# EAGLE board SOIC-24-panel-4x1x2 (EAGLE 5.00)
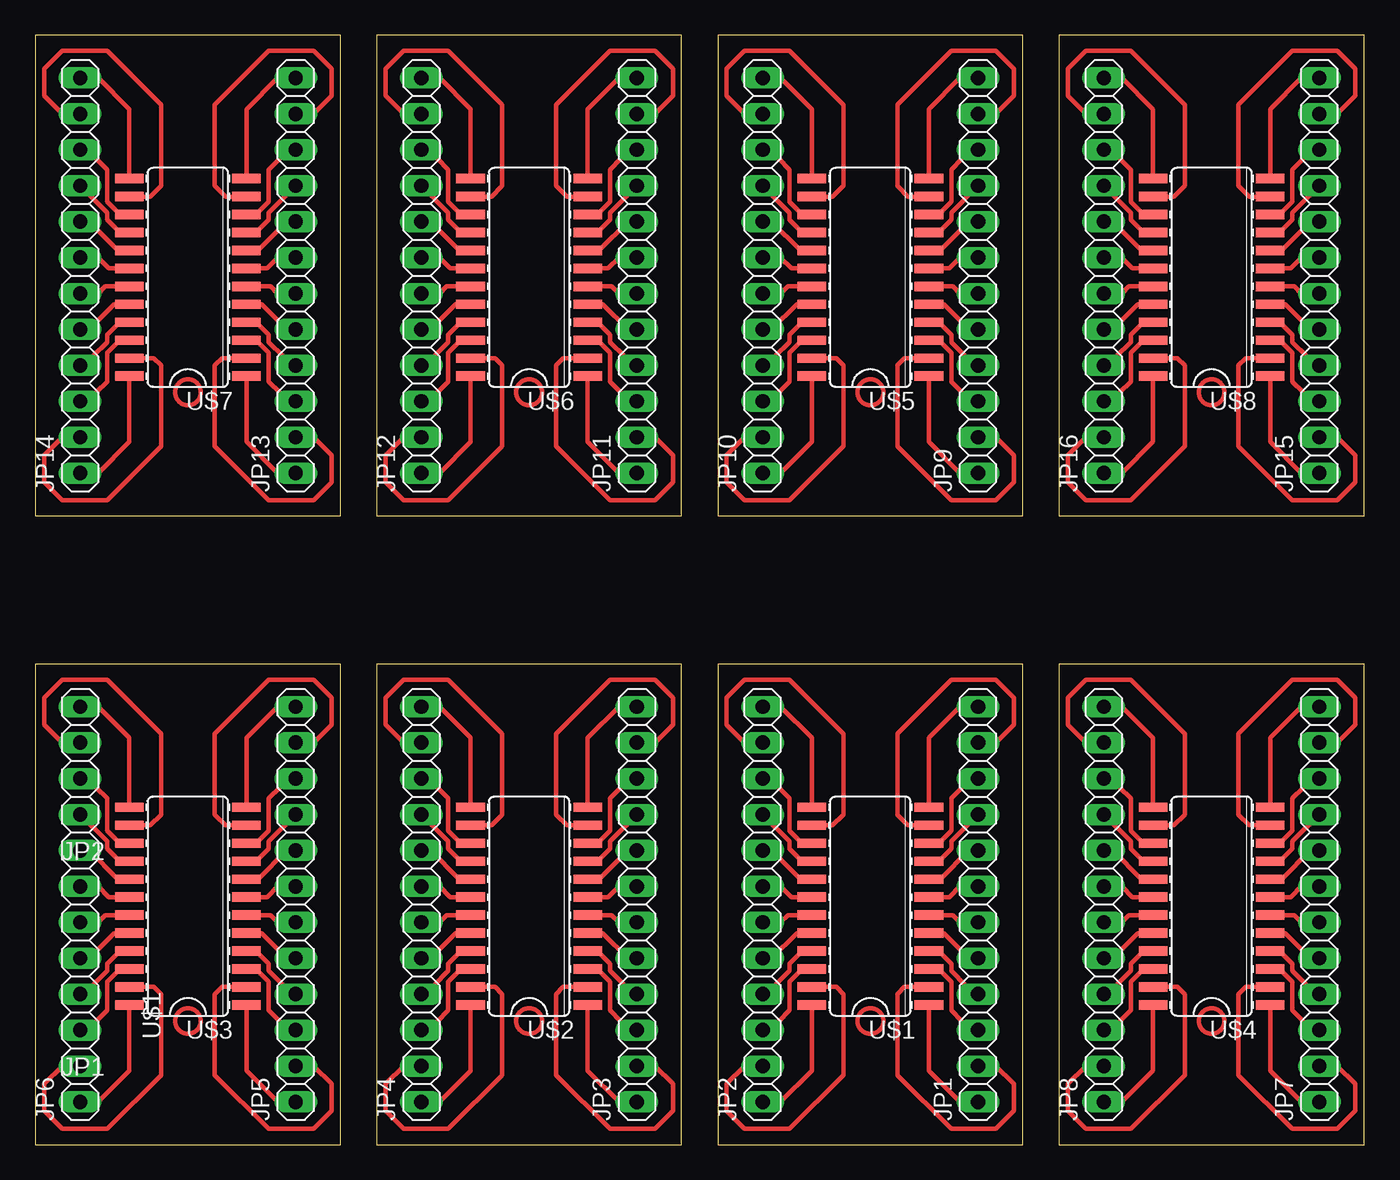
[diagram p0: board, top side]

Size 93.97 x 78.41 mm. Coordinates in mm from the lower left corner, seen from the top.
Outline: 69.84,0 69.84,33.96 48.26,33.96 48.26,0 69.84,0
Outline: 45.71,0 45.71,33.96 24.13,33.96 24.13,0 45.71,0
Outline: 21.58,0 21.58,33.96 0,33.96 0,0 21.58,0
Outline: 93.97,0 93.97,33.96 72.39,33.96 72.39,0 93.97,0
Outline: 69.84,44.45 69.84,78.41 48.26,78.41 48.26,44.45 69.84,44.45
Outline: 45.71,44.45 45.71,78.41 24.13,78.41 24.13,44.45 45.71,44.45
Outline: 21.58,44.45 21.58,78.41 0,78.41 0,44.45 21.58,44.45
Outline: 93.97,44.45 93.97,78.41 72.39,78.41 72.39,44.45 93.97,44.45
Copper layers (1*16): Top 0.035mm / dielectric 1.5mm / Bottom 0.035mm
Design rules "default": minimum track width 10mil, minimum drill 24mil, track to track 8mil, track to pad 8mil, pad to pad 8mil, via to via 8mil, smd to smd 8mil, copper to edge 40mil, drill to drill 8mil, minimum pad ring 10mil, minimum via ring 8mil, stop-mask expansion 4mil, vias tented up to drill 0mil, thermal gap 10mil

## Footprints (pad centres in the part's own frame; a part is rotated, then mirrored left to right if it is on the bottom)
1X12 = drill 1.016 long: 1 -13.97,0; 2 -11.43,0; 3 -8.89,0; 4 -6.35,0; 5 -3.81,0; 6 -1.27,0; 7 1.27,0; 8 3.81,0; 9 6.35,0; 10 8.89,0; 11 11.43,0; 12 13.97,0
SOIC-24 = smd 0.66 x 2.032: 1 -6.985,-4.14; 2 -5.715,-4.14; 3 -4.445,-4.14; 4 -3.175,-4.14; 5 -1.905,-4.14; 6 -0.635,-4.14; 7 0.635,-4.14; 8 1.905,-4.14; 9 3.175,-4.14; 10 4.445,-4.14; 11 5.715,-4.14; 12 6.985,-4.14; 13 6.985,4.14; 14 5.715,4.14; 15 4.445,4.14; 16 3.175,4.14; 17 1.905,4.14; 18 0.635,4.14; 19 -0.635,4.14; 20 -1.905,4.14; 21 -3.175,4.14; 22 -4.445,4.14; 23 -5.715,4.14; 24 -6.985,4.14

## Placement (x,y rotation side)
JP1  [1X12]  66.67,16.98 90 top
JP2  [1X12]  51.43,16.98 90 top
JP3  [1X12]  42.54,16.98 90 top
JP4  [1X12]  27.3,16.98 90 top
JP5  [1X12]  18.41,16.98 90 top
JP6  [1X12]  3.17,16.98 90 top
JP7  [1X12]  90.8,16.98 90 top
JP8  [1X12]  75.56,16.98 90 top
JP9  [1X12]  66.67,61.43 90 top
JP10  [1X12]  51.43,61.43 90 top
JP11  [1X12]  42.54,61.43 90 top
JP12  [1X12]  27.3,61.43 90 top
JP13  [1X12]  18.41,61.43 90 top
JP14  [1X12]  3.17,61.43 90 top
JP15  [1X12]  90.8,61.43 90 top
JP16  [1X12]  75.56,61.43 90 top
U$1  SOIC-24  [SOIC-24]  59.05,16.85 90 top
U$2  SOIC-24  [SOIC-24]  34.92,16.85 90 top
U$3  SOIC-24  [SOIC-24]  10.79,16.85 90 top
U$4  SOIC-24  [SOIC-24]  83.18,16.85 90 top
U$5  SOIC-24  [SOIC-24]  59.05,61.3 90 top
U$6  SOIC-24  [SOIC-24]  34.92,61.3 90 top
U$7  SOIC-24  [SOIC-24]  10.79,61.3 90 top
U$8  SOIC-24  [SOIC-24]  83.18,61.3 90 top

## Library data of the parts
JP1-JP16 = pinhead
U$1-U$8 = smd

## Nets
N$1: JP1.1 U$1.1
N$2: JP1.2 U$1.2
N$3: JP1.3 U$1.3
N$4: JP1.4 U$1.4
N$5: JP1.5 U$1.5
N$6: JP1.6 U$1.6
N$7: JP1.7 U$1.7
N$8: JP1.8 U$1.8
N$9: JP1.9 U$1.9
N$10: JP1.10 U$1.10
N$11: JP1.11 U$1.11
N$12: JP1.12 U$1.12
N$13: JP2.1 U$1.24
N$14: JP2.2 U$1.23
N$15: JP2.3 U$1.22
N$16: JP2.4 U$1.21
N$17: JP2.5 U$1.20
N$18: JP2.6 U$1.19
N$19: JP2.7 U$1.18
N$20: JP2.8 U$1.17
N$21: JP2.9 U$1.16
N$22: JP2.10 U$1.15
N$23: JP2.11 U$1.14
N$24: JP2.12 U$1.13
N$25: JP3.1 U$2.1
N$26: JP3.2 U$2.2
N$27: JP3.3 U$2.3
N$28: JP3.4 U$2.4
N$29: JP3.5 U$2.5
N$30: JP3.6 U$2.6
N$31: JP3.7 U$2.7
N$32: JP3.8 U$2.8
N$33: JP3.9 U$2.9
N$34: JP3.10 U$2.10
N$35: JP3.11 U$2.11
N$36: JP3.12 U$2.12
N$37: JP4.1 U$2.24
N$38: JP4.2 U$2.23
N$39: JP4.3 U$2.22
N$40: JP4.4 U$2.21
N$41: JP4.5 U$2.20
N$42: JP4.6 U$2.19
N$43: JP4.7 U$2.18
N$44: JP4.8 U$2.17
N$45: JP4.9 U$2.16
N$46: JP4.10 U$2.15
N$47: JP4.11 U$2.14
N$48: JP4.12 U$2.13
N$49: JP5.1 U$3.1
N$50: JP5.2 U$3.2
N$51: JP5.3 U$3.3
N$52: JP5.4 U$3.4
N$53: JP5.5 U$3.5
N$54: JP5.6 U$3.6
N$55: JP5.7 U$3.7
N$56: JP5.8 U$3.8
N$57: JP5.9 U$3.9
N$58: JP5.10 U$3.10
N$59: JP5.11 U$3.11
N$60: JP5.12 U$3.12
N$61: JP6.1 U$3.24
N$62: JP6.2 U$3.23
N$63: JP6.3 U$3.22
N$64: JP6.4 U$3.21
N$65: JP6.5 U$3.20
N$66: JP6.6 U$3.19
N$67: JP6.7 U$3.18
N$68: JP6.8 U$3.17
N$69: JP6.9 U$3.16
N$70: JP6.10 U$3.15
N$71: JP6.11 U$3.14
N$72: JP6.12 U$3.13
N$73: JP7.1 U$4.1
N$74: JP7.2 U$4.2
N$75: JP7.3 U$4.3
N$76: JP7.4 U$4.4
N$77: JP7.5 U$4.5
N$78: JP7.6 U$4.6
N$79: JP7.7 U$4.7
N$80: JP7.8 U$4.8
N$81: JP7.9 U$4.9
N$82: JP7.10 U$4.10
N$83: JP7.11 U$4.11
N$84: JP7.12 U$4.12
N$85: JP8.1 U$4.24
N$86: JP8.2 U$4.23
N$87: JP8.3 U$4.22
N$88: JP8.4 U$4.21
N$89: JP8.5 U$4.20
N$90: JP8.6 U$4.19
N$91: JP8.7 U$4.18
N$92: JP8.8 U$4.17
N$93: JP8.9 U$4.16
N$94: JP8.10 U$4.15
N$95: JP8.11 U$4.14
N$96: JP8.12 U$4.13
N$97: JP9.1 U$5.1
N$98: JP9.2 U$5.2
N$99: JP9.3 U$5.3
N$100: JP9.4 U$5.4
N$101: JP9.5 U$5.5
N$102: JP9.6 U$5.6
N$103: JP9.7 U$5.7
N$104: JP9.8 U$5.8
N$105: JP9.9 U$5.9
N$106: JP9.10 U$5.10
N$107: JP9.11 U$5.11
N$108: JP9.12 U$5.12
N$109: JP10.1 U$5.24
N$110: JP10.2 U$5.23
N$111: JP10.3 U$5.22
N$112: JP10.4 U$5.21
N$113: JP10.5 U$5.20
N$114: JP10.6 U$5.19
N$115: JP10.7 U$5.18
N$116: JP10.8 U$5.17
N$117: JP10.9 U$5.16
N$118: JP10.10 U$5.15
N$119: JP10.11 U$5.14
N$120: JP10.12 U$5.13
N$121: JP11.1 U$6.1
N$122: JP11.2 U$6.2
N$123: JP11.3 U$6.3
N$124: JP11.4 U$6.4
N$125: JP11.5 U$6.5
N$126: JP11.6 U$6.6
N$127: JP11.7 U$6.7
N$128: JP11.8 U$6.8
N$129: JP11.9 U$6.9
N$130: JP11.10 U$6.10
N$131: JP11.11 U$6.11
N$132: JP11.12 U$6.12
N$133: JP12.1 U$6.24
N$134: JP12.2 U$6.23
N$135: JP12.3 U$6.22
N$136: JP12.4 U$6.21
N$137: JP12.5 U$6.20
N$138: JP12.6 U$6.19
N$139: JP12.7 U$6.18
N$140: JP12.8 U$6.17
N$141: JP12.9 U$6.16
N$142: JP12.10 U$6.15
N$143: JP12.11 U$6.14
N$144: JP12.12 U$6.13
N$145: JP13.1 U$7.1
N$146: JP13.2 U$7.2
N$147: JP13.3 U$7.3
N$148: JP13.4 U$7.4
N$149: JP13.5 U$7.5
N$150: JP13.6 U$7.6
N$151: JP13.7 U$7.7
N$152: JP13.8 U$7.8
N$153: JP13.9 U$7.9
N$154: JP13.10 U$7.10
N$155: JP13.11 U$7.11
N$156: JP13.12 U$7.12
N$157: JP14.1 U$7.24
N$158: JP14.2 U$7.23
N$159: JP14.3 U$7.22
N$160: JP14.4 U$7.21
N$161: JP14.5 U$7.20
N$162: JP14.6 U$7.19
N$163: JP14.7 U$7.18
N$164: JP14.8 U$7.17
N$165: JP14.9 U$7.16
N$166: JP14.10 U$7.15
N$167: JP14.11 U$7.14
N$168: JP14.12 U$7.13
N$169: JP15.1 U$8.1
N$170: JP15.2 U$8.2
N$171: JP15.3 U$8.3
N$172: JP15.4 U$8.4
N$173: JP15.5 U$8.5
N$174: JP15.6 U$8.6
N$175: JP15.7 U$8.7
N$176: JP15.8 U$8.8
N$177: JP15.9 U$8.9
N$178: JP15.10 U$8.10
N$179: JP15.11 U$8.11
N$180: JP15.12 U$8.12
N$181: JP16.1 U$8.24
N$182: JP16.2 U$8.23
N$183: JP16.3 U$8.22
N$184: JP16.4 U$8.21
N$185: JP16.5 U$8.20
N$186: JP16.6 U$8.19
N$187: JP16.7 U$8.18
N$188: JP16.8 U$8.17
N$189: JP16.9 U$8.16
N$190: JP16.10 U$8.15
N$191: JP16.11 U$8.14
N$192: JP16.12 U$8.13

## Tracks (layer width: path | path; a pad name or v marks a point on that pad's centre or on a via)
N$1
  Top 0.305: U$1.1 63.19,5.22 65.4,3.01 JP1.1
N$2
  Top 0.305: U$1.2 61.46,11.14 60.96,10.63 60.96,4.92 64.77,1.1 67.94,1.1 69.21,2.38 69.21,4.28 67.94,5.55 JP1.2
N$3
  Top 0.254: 64.13,12.15 U$1.3
  Top 0.305: 64.13,12.15 64.77,11.52 64.77,9.49 65.53,8.73 JP1.3
N$4
  Top 0.254: 64.13,13.42 U$1.4
  Top 0.305: 64.13,13.42 64.77,12.79 64.77,12.28 65.78,11.27 JP1.4
N$5
  Top 0.305: U$1.5 64.26,14.95 66.03,13.17 JP1.5
N$6
  Top 0.305: U$1.6 64.89,16.22 65.4,15.71 JP1.6
N$7
  Top 0.305: U$1.7 64.64,17.49 65.4,18.25 JP1.7
N$8
  Top 0.305: 64,18.76 66.03,20.79 JP1.8
  Top 0.406: U$1.8 64,18.76
N$9
  Top 0.254: U$1.9 64.13,20.28
  Top 0.305: 64.13,20.28 64.77,20.92 64.77,21.42 JP1.9
N$10
  Top 0.254: 64.13,21.55 U$1.10
  Top 0.305: 64.13,21.55 64.77,22.19 64.77,24.47 65.53,25.23 JP1.10
N$11
  Top 0.305: U$1.11 61.72,22.57 60.96,23.33 60.96,29.04 64.77,32.85 67.94,32.85 69.21,31.58 69.21,29.68 67.94,28.41 JP1.11
N$12
  Top 0.305: U$1.12 63.19,28.74 65.4,30.95 JP1.12
N$13
  Top 0.305: U$1.24 54.91,5.22 52.7,3.01 JP2.1
N$14
  Top 0.305: U$1.23 56.64,11.14 57.15,10.63 57.15,4.92 53.34,1.1 50.16,1.1 48.89,2.38 48.89,4.28 50.16,5.55 JP2.2
N$15
  Top 0.254: U$1.22 53.97,12.15
  Top 0.305: 53.97,12.15 53.34,11.52 53.34,9.49 52.57,8.73 JP2.3
N$16
  Top 0.254: U$1.21 53.97,13.42
  Top 0.305: 53.97,13.42 53.34,12.79 53.34,12.28 52.32,11.27 JP2.4
N$17
  Top 0.305: U$1.20 53.84,14.95 52.07,13.17 JP2.5
N$18
  Top 0.305: U$1.19 53.21,16.22 52.7,15.71 JP2.6
N$19
  Top 0.305: U$1.18 53.46,17.49 52.7,18.25 JP2.7
N$20
  Top 0.305: U$1.17 54.1,18.76 52.07,20.79 JP2.8
N$21
  Top 0.254: U$1.16 53.97,20.28
  Top 0.305: 53.97,20.28 53.34,20.92 53.34,21.42 JP2.9
N$22
  Top 0.254: U$1.15 53.97,21.55
  Top 0.305: 53.97,21.55 53.34,22.19 53.34,24.47 52.57,25.23 JP2.10
N$23
  Top 0.305: U$1.14 56.38,22.57 57.15,23.33 57.15,29.04 53.34,32.85 50.16,32.85 48.89,31.58 48.89,29.68 50.16,28.41
  Top 0.406: 50.16,28.41 JP2.11
N$24
  Top 0.305: U$1.13 54.91,28.74 52.7,30.95 JP2.12
N$25
  Top 0.305: U$2.1 39.06,5.22 41.27,3.01 JP3.1
N$26
  Top 0.305: U$2.2 37.33,11.14 36.83,10.63 36.83,4.92 40.64,1.1 43.81,1.1 45.08,2.38 45.08,4.28 43.81,5.55 JP3.2
N$27
  Top 0.254: 40,12.15 U$2.3
  Top 0.305: 40,12.15 40.64,11.52 40.64,9.49 41.4,8.73 JP3.3
N$28
  Top 0.254: 40,13.42 U$2.4
  Top 0.305: 40,13.42 40.64,12.79 40.64,12.28 41.65,11.27 JP3.4
N$29
  Top 0.305: U$2.5 40.13,14.95 41.91,13.17 JP3.5
N$30
  Top 0.305: U$2.6 40.76,16.22 41.27,15.71 JP3.6
N$31
  Top 0.305: U$2.7 40.51,17.49 41.27,18.25 JP3.7
N$32
  Top 0.305: 39.87,18.76 41.91,20.79 JP3.8
  Top 0.406: U$2.8 39.87,18.76
N$33
  Top 0.254: U$2.9 40,20.28
  Top 0.305: 40,20.28 40.64,20.92 40.64,21.42 JP3.9
N$34
  Top 0.254: 40,21.55 U$2.10
  Top 0.305: 40,21.55 40.64,22.19 40.64,24.47 41.4,25.23 JP3.10
N$35
  Top 0.305: U$2.11 37.59,22.57 36.83,23.33 36.83,29.04 40.64,32.85 43.81,32.85 45.08,31.58 45.08,29.68 43.81,28.41 JP3.11
N$36
  Top 0.305: U$2.12 39.06,28.74 41.27,30.95 JP3.12
N$37
  Top 0.305: U$2.24 30.78,5.22 28.57,3.01 JP4.1
N$38
  Top 0.305: U$2.23 32.51,11.14 33.02,10.63 33.02,4.92 29.2,1.1 26.03,1.1 24.76,2.38 24.76,4.28 26.03,5.55 JP4.2
N$39
  Top 0.254: U$2.22 29.84,12.15
  Top 0.305: 29.84,12.15 29.2,11.52 29.2,9.49 28.44,8.73 JP4.3
N$40
  Top 0.254: U$2.21 29.84,13.42
  Top 0.305: 29.84,13.42 29.2,12.79 29.2,12.28 28.19,11.27 JP4.4
N$41
  Top 0.305: U$2.20 29.71,14.95 27.93,13.17 JP4.5
N$42
  Top 0.305: U$2.19 29.08,16.22 28.57,15.71 JP4.6
N$43
  Top 0.305: U$2.18 29.33,17.49 28.57,18.25 JP4.7
N$44
  Top 0.305: U$2.17 29.97,18.76 27.93,20.79 JP4.8
N$45
  Top 0.254: U$2.16 29.84,20.28
  Top 0.305: 29.84,20.28 29.2,20.92 29.2,21.42 JP4.9
N$46
  Top 0.254: U$2.15 29.84,21.55
  Top 0.305: 29.84,21.55 29.2,22.19 29.2,24.47 28.44,25.23 JP4.10
N$47
  Top 0.305: U$2.14 32.25,22.57 33.02,23.33 33.02,29.04 29.2,32.85 26.03,32.85 24.76,31.58 24.76,29.68 26.03,28.41
  Top 0.406: 26.03,28.41 JP4.11
N$48
  Top 0.305: U$2.13 30.78,28.74 28.57,30.95 JP4.12
N$49
  Top 0.305: U$3.1 14.93,5.22 17.14,3.01 JP5.1
N$50
  Top 0.305: U$3.2 13.2,11.14 12.7,10.63 12.7,4.92 16.5,1.1 19.68,1.1 20.95,2.38 20.95,4.28 19.68,5.55 JP5.2
N$51
  Top 0.254: 15.87,12.15 U$3.3
  Top 0.305: 15.87,12.15 16.5,11.52 16.5,9.49 17.27,8.73 JP5.3
N$52
  Top 0.254: 15.87,13.42 U$3.4
  Top 0.305: 15.87,13.42 16.5,12.79 16.5,12.28 17.52,11.27 JP5.4
N$53
  Top 0.305: U$3.5 16,14.95 17.77,13.17 JP5.5
N$54
  Top 0.305: U$3.6 16.63,16.22 17.14,15.71 JP5.6
N$55
  Top 0.305: U$3.7 16.38,17.49 17.14,18.25 JP5.7
N$56
  Top 0.305: 15.74,18.76 17.77,20.79 JP5.8
  Top 0.406: U$3.8 15.74,18.76
N$57
  Top 0.254: U$3.9 15.87,20.28
  Top 0.305: 15.87,20.28 16.5,20.92 16.5,21.42 JP5.9
N$58
  Top 0.254: 15.87,21.55 U$3.10
  Top 0.305: 15.87,21.55 16.5,22.19 16.5,24.47 17.27,25.23 JP5.10
N$59
  Top 0.305: U$3.11 13.46,22.57 12.7,23.33 12.7,29.04 16.5,32.85 19.68,32.85 20.95,31.58 20.95,29.68 19.68,28.41 JP5.11
N$60
  Top 0.305: U$3.12 14.93,28.74 17.14,30.95 JP5.12
N$61
  Top 0.305: U$3.24 6.65,5.22 4.44,3.01 JP6.1
N$62
  Top 0.305: U$3.23 8.38,11.14 8.89,10.63 8.89,4.92 5.08,1.1 1.9,1.1 0.63,2.38 0.63,4.28 1.9,5.55 JP6.2
N$63
  Top 0.254: U$3.22 5.71,12.15
  Top 0.305: 5.71,12.15 5.08,11.52 5.08,9.49 4.31,8.73 JP6.3
N$64
  Top 0.254: U$3.21 5.71,13.42
  Top 0.305: 5.71,13.42 5.08,12.79 5.08,12.28 4.06,11.27 JP6.4
N$65
  Top 0.305: U$3.20 5.58,14.95 3.8,13.17 JP6.5
N$66
  Top 0.305: U$3.19 4.95,16.22 4.44,15.71 JP6.6
N$67
  Top 0.305: U$3.18 5.2,17.49 4.44,18.25 JP6.7
N$68
  Top 0.305: U$3.17 5.84,18.76 3.8,20.79 JP6.8
N$69
  Top 0.254: U$3.16 5.71,20.28
  Top 0.305: 5.71,20.28 5.08,20.92 5.08,21.42 JP6.9
N$70
  Top 0.254: U$3.15 5.71,21.55
  Top 0.305: 5.71,21.55 5.08,22.19 5.08,24.47 4.31,25.23 JP6.10
N$71
  Top 0.305: U$3.14 8.12,22.57 8.89,23.33 8.89,29.04 5.08,32.85 1.9,32.85 0.63,31.58 0.63,29.68 1.9,28.41
  Top 0.406: 1.9,28.41 JP6.11
N$72
  Top 0.305: U$3.13 6.65,28.74 4.44,30.95 JP6.12
N$73
  Top 0.305: U$4.1 87.32,5.22 89.53,3.01 JP7.1
N$74
  Top 0.305: U$4.2 85.59,11.14 85.08,10.63 85.08,4.92 88.89,1.1 92.07,1.1 93.34,2.38 93.34,4.28 92.07,5.55 JP7.2
N$75
  Top 0.254: 88.26,12.15 U$4.3
  Top 0.305: 88.26,12.15 88.89,11.52 88.89,9.49 89.66,8.73 JP7.3
N$76
  Top 0.254: 88.26,13.42 U$4.4
  Top 0.305: 88.26,13.42 88.89,12.79 88.89,12.28 89.91,11.27 JP7.4
N$77
  Top 0.305: U$4.5 88.39,14.95 90.16,13.17 JP7.5
N$78
  Top 0.305: U$4.6 89.02,16.22 89.53,15.71 JP7.6
N$79
  Top 0.305: U$4.7 88.77,17.49 89.53,18.25 JP7.7
N$80
  Top 0.305: 88.13,18.76 90.16,20.79 JP7.8
  Top 0.406: U$4.8 88.13,18.76
N$81
  Top 0.254: U$4.9 88.26,20.28
  Top 0.305: 88.26,20.28 88.89,20.92 88.89,21.42 JP7.9
N$82
  Top 0.254: 88.26,21.55 U$4.10
  Top 0.305: 88.26,21.55 88.89,22.19 88.89,24.47 89.66,25.23 JP7.10
N$83
  Top 0.305: U$4.11 85.85,22.57 85.08,23.33 85.08,29.04 88.89,32.85 92.07,32.85 93.34,31.58 93.34,29.68 92.07,28.41 JP7.11
N$84
  Top 0.305: U$4.12 87.32,28.74 89.53,30.95 JP7.12
N$85
  Top 0.305: U$4.24 79.04,5.22 76.83,3.01 JP8.1
N$86
  Top 0.305: U$4.23 80.77,11.14 81.27,10.63 81.27,4.92 77.46,1.1 74.29,1.1 73.02,2.38 73.02,4.28 74.29,5.55 JP8.2
N$87
  Top 0.254: U$4.22 78.1,12.15
  Top 0.305: 78.1,12.15 77.46,11.52 77.46,9.49 76.7,8.73 JP8.3
N$88
  Top 0.254: U$4.21 78.1,13.42
  Top 0.305: 78.1,13.42 77.46,12.79 77.46,12.28 76.45,11.27 JP8.4
N$89
  Top 0.305: U$4.20 77.97,14.95 76.19,13.17 JP8.5
N$90
  Top 0.305: U$4.19 77.34,16.22 76.83,15.71 JP8.6
N$91
  Top 0.305: U$4.18 77.59,17.49 76.83,18.25 JP8.7
N$92
  Top 0.305: U$4.17 78.23,18.76 76.19,20.79 JP8.8
N$93
  Top 0.254: U$4.16 78.1,20.28
  Top 0.305: 78.1,20.28 77.46,20.92 77.46,21.42 JP8.9
N$94
  Top 0.254: U$4.15 78.1,21.55
  Top 0.305: 78.1,21.55 77.46,22.19 77.46,24.47 76.7,25.23 JP8.10
N$95
  Top 0.305: U$4.14 80.51,22.57 81.27,23.33 81.27,29.04 77.46,32.85 74.29,32.85 73.02,31.58 73.02,29.68 74.29,28.41
  Top 0.406: 74.29,28.41 JP8.11
N$96
  Top 0.305: U$4.13 79.04,28.74 76.83,30.95 JP8.12
N$97
  Top 0.305: U$5.1 63.19,49.67 65.4,47.46 JP9.1
N$98
  Top 0.305: U$5.2 61.46,55.59 60.96,55.08 60.96,49.37 64.77,45.55 67.94,45.55 69.21,46.82 69.21,48.73 67.94,50 JP9.2
N$99
  Top 0.254: 64.13,56.6 U$5.3
  Top 0.305: 64.13,56.6 64.77,55.97 64.77,53.94 65.53,53.17 JP9.3
N$100
  Top 0.254: 64.13,57.87 U$5.4
  Top 0.305: 64.13,57.87 64.77,57.24 64.77,56.73 65.78,55.71 JP9.4
N$101
  Top 0.305: U$5.5 64.26,59.4 66.03,57.62 JP9.5
N$102
  Top 0.305: U$5.6 64.89,60.67 65.4,60.16 JP9.6
N$103
  Top 0.305: U$5.7 64.64,61.94 65.4,62.7 JP9.7
N$104
  Top 0.305: 64,63.21 66.03,65.24 JP9.8
  Top 0.406: U$5.8 64,63.21
N$105
  Top 0.254: U$5.9 64.13,64.73
  Top 0.305: 64.13,64.73 64.77,65.37 64.77,65.88 JP9.9
N$106
  Top 0.254: 64.13,66 U$5.10
  Top 0.305: 64.13,66 64.77,66.64 64.77,68.92 65.53,69.69 JP9.10
N$107
  Top 0.305: U$5.11 61.72,67.02 60.96,67.78 60.96,73.5 64.77,77.3 67.94,77.3 69.21,76.03 69.21,74.13 67.94,72.86 JP9.11
N$108
  Top 0.305: U$5.12 63.19,73.19 65.4,75.4 JP9.12
N$109
  Top 0.305: U$5.24 54.91,49.67 52.7,47.46 JP10.1
N$110
  Top 0.305: U$5.23 56.64,55.59 57.15,55.08 57.15,49.37 53.34,45.55 50.16,45.55 48.89,46.82 48.89,48.73 50.16,50 JP10.2
N$111
  Top 0.254: U$5.22 53.97,56.6
  Top 0.305: 53.97,56.6 53.34,55.97 53.34,53.94 52.57,53.17 JP10.3
N$112
  Top 0.254: U$5.21 53.97,57.87
  Top 0.305: 53.97,57.87 53.34,57.24 53.34,56.73 52.32,55.71 JP10.4
N$113
  Top 0.305: U$5.20 53.84,59.4 52.07,57.62 JP10.5
N$114
  Top 0.305: U$5.19 53.21,60.67 52.7,60.16 JP10.6
N$115
  Top 0.305: U$5.18 53.46,61.94 52.7,62.7 JP10.7
N$116
  Top 0.305: U$5.17 54.1,63.21 52.07,65.24 JP10.8
N$117
  Top 0.254: U$5.16 53.97,64.73
  Top 0.305: 53.97,64.73 53.34,65.37 53.34,65.88 JP10.9
N$118
  Top 0.254: U$5.15 53.97,66
  Top 0.305: 53.97,66 53.34,66.64 53.34,68.92 52.57,69.69 JP10.10
N$119
  Top 0.305: U$5.14 56.38,67.02 57.15,67.78 57.15,73.5 53.34,77.3 50.16,77.3 48.89,76.03 48.89,74.13 50.16,72.86
  Top 0.406: 50.16,72.86 JP10.11
N$120
  Top 0.305: U$5.13 54.91,73.19 52.7,75.4 JP10.12
N$121
  Top 0.305: U$6.1 39.06,49.67 41.27,47.46 JP11.1
N$122
  Top 0.305: U$6.2 37.33,55.59 36.83,55.08 36.83,49.37 40.64,45.55 43.81,45.55 45.08,46.82 45.08,48.73 43.81,50 JP11.2
N$123
  Top 0.254: 40,56.6 U$6.3
  Top 0.305: 40,56.6 40.64,55.97 40.64,53.94 41.4,53.17 JP11.3
N$124
  Top 0.254: 40,57.87 U$6.4
  Top 0.305: 40,57.87 40.64,57.24 40.64,56.73 41.65,55.71 JP11.4
N$125
  Top 0.305: U$6.5 40.13,59.4 41.91,57.62 JP11.5
N$126
  Top 0.305: U$6.6 40.76,60.67 41.27,60.16 JP11.6
N$127
  Top 0.305: U$6.7 40.51,61.94 41.27,62.7 JP11.7
N$128
  Top 0.305: 39.87,63.21 41.91,65.24 JP11.8
  Top 0.406: U$6.8 39.87,63.21
N$129
  Top 0.254: U$6.9 40,64.73
  Top 0.305: 40,64.73 40.64,65.37 40.64,65.88 JP11.9
N$130
  Top 0.254: 40,66 U$6.10
  Top 0.305: 40,66 40.64,66.64 40.64,68.92 41.4,69.69 JP11.10
N$131
  Top 0.305: U$6.11 37.59,67.02 36.83,67.78 36.83,73.5 40.64,77.3 43.81,77.3 45.08,76.03 45.08,74.13 43.81,72.86 JP11.11
N$132
  Top 0.305: U$6.12 39.06,73.19 41.27,75.4 JP11.12
N$133
  Top 0.305: U$6.24 30.78,49.67 28.57,47.46 JP12.1
N$134
  Top 0.305: U$6.23 32.51,55.59 33.02,55.08 33.02,49.37 29.2,45.55 26.03,45.55 24.76,46.82 24.76,48.73 26.03,50 JP12.2
N$135
  Top 0.254: U$6.22 29.84,56.6
  Top 0.305: 29.84,56.6 29.2,55.97 29.2,53.94 28.44,53.17 JP12.3
N$136
  Top 0.254: U$6.21 29.84,57.87
  Top 0.305: 29.84,57.87 29.2,57.24 29.2,56.73 28.19,55.71 JP12.4
N$137
  Top 0.305: U$6.20 29.71,59.4 27.93,57.62 JP12.5
N$138
  Top 0.305: U$6.19 29.08,60.67 28.57,60.16 JP12.6
N$139
  Top 0.305: U$6.18 29.33,61.94 28.57,62.7 JP12.7
N$140
  Top 0.305: U$6.17 29.97,63.21 27.93,65.24 JP12.8
N$141
  Top 0.254: U$6.16 29.84,64.73
  Top 0.305: 29.84,64.73 29.2,65.37 29.2,65.88 JP12.9
N$142
  Top 0.254: U$6.15 29.84,66
  Top 0.305: 29.84,66 29.2,66.64 29.2,68.92 28.44,69.69 JP12.10
N$143
  Top 0.305: U$6.14 32.25,67.02 33.02,67.78 33.02,73.5 29.2,77.3 26.03,77.3 24.76,76.03 24.76,74.13 26.03,72.86
  Top 0.406: 26.03,72.86 JP12.11
N$144
  Top 0.305: U$6.13 30.78,73.19 28.57,75.4 JP12.12
N$145
  Top 0.305: U$7.1 14.93,49.67 17.14,47.46 JP13.1
N$146
  Top 0.305: U$7.2 13.2,55.59 12.7,55.08 12.7,49.37 16.5,45.55 19.68,45.55 20.95,46.82 20.95,48.73 19.68,50 JP13.2
N$147
  Top 0.254: 15.87,56.6 U$7.3
  Top 0.305: 15.87,56.6 16.5,55.97 16.5,53.94 17.27,53.17 JP13.3
N$148
  Top 0.254: 15.87,57.87 U$7.4
  Top 0.305: 15.87,57.87 16.5,57.24 16.5,56.73 17.52,55.71 JP13.4
N$149
  Top 0.305: U$7.5 16,59.4 17.77,57.62 JP13.5
N$150
  Top 0.305: U$7.6 16.63,60.67 17.14,60.16 JP13.6
N$151
  Top 0.305: U$7.7 16.38,61.94 17.14,62.7 JP13.7
N$152
  Top 0.305: 15.74,63.21 17.77,65.24 JP13.8
  Top 0.406: U$7.8 15.74,63.21
N$153
  Top 0.254: U$7.9 15.87,64.73
  Top 0.305: 15.87,64.73 16.5,65.37 16.5,65.88 JP13.9
N$154
  Top 0.254: 15.87,66 U$7.10
  Top 0.305: 15.87,66 16.5,66.64 16.5,68.92 17.27,69.69 JP13.10
N$155
  Top 0.305: U$7.11 13.46,67.02 12.7,67.78 12.7,73.5 16.5,77.3 19.68,77.3 20.95,76.03 20.95,74.13 19.68,72.86 JP13.11
N$156
  Top 0.305: U$7.12 14.93,73.19 17.14,75.4 JP13.12
N$157
  Top 0.305: U$7.24 6.65,49.67 4.44,47.46 JP14.1
N$158
  Top 0.305: U$7.23 8.38,55.59 8.89,55.08 8.89,49.37 5.08,45.55 1.9,45.55 0.63,46.82 0.63,48.73 1.9,50 JP14.2
N$159
  Top 0.254: U$7.22 5.71,56.6
  Top 0.305: 5.71,56.6 5.08,55.97 5.08,53.94 4.31,53.17 JP14.3
N$160
  Top 0.254: U$7.21 5.71,57.87
  Top 0.305: 5.71,57.87 5.08,57.24 5.08,56.73 4.06,55.71 JP14.4
N$161
  Top 0.305: U$7.20 5.58,59.4 3.8,57.62 JP14.5
N$162
  Top 0.305: U$7.19 4.95,60.67 4.44,60.16 JP14.6
N$163
  Top 0.305: U$7.18 5.2,61.94 4.44,62.7 JP14.7
N$164
  Top 0.305: U$7.17 5.84,63.21 3.8,65.24 JP14.8
N$165
  Top 0.254: U$7.16 5.71,64.73
  Top 0.305: 5.71,64.73 5.08,65.37 5.08,65.88 JP14.9
N$166
  Top 0.254: U$7.15 5.71,66
  Top 0.305: 5.71,66 5.08,66.64 5.08,68.92 4.31,69.69 JP14.10
N$167
  Top 0.305: U$7.14 8.12,67.02 8.89,67.78 8.89,73.5 5.08,77.3 1.9,77.3 0.63,76.03 0.63,74.13 1.9,72.86
  Top 0.406: 1.9,72.86 JP14.11
N$168
  Top 0.305: U$7.13 6.65,73.19 4.44,75.4 JP14.12
N$169
  Top 0.305: U$8.1 87.32,49.67 89.53,47.46 JP15.1
N$170
  Top 0.305: U$8.2 85.59,55.59 85.08,55.08 85.08,49.37 88.89,45.55 92.07,45.55 93.34,46.82 93.34,48.73 92.07,50 JP15.2
N$171
  Top 0.254: 88.26,56.6 U$8.3
  Top 0.305: 88.26,56.6 88.89,55.97 88.89,53.94 89.66,53.17 JP15.3
N$172
  Top 0.254: 88.26,57.87 U$8.4
  Top 0.305: 88.26,57.87 88.89,57.24 88.89,56.73 89.91,55.71 JP15.4
N$173
  Top 0.305: U$8.5 88.39,59.4 90.16,57.62 JP15.5
N$174
  Top 0.305: U$8.6 89.02,60.67 89.53,60.16 JP15.6
N$175
  Top 0.305: U$8.7 88.77,61.94 89.53,62.7 JP15.7
N$176
  Top 0.305: 88.13,63.21 90.16,65.24 JP15.8
  Top 0.406: U$8.8 88.13,63.21
N$177
  Top 0.254: U$8.9 88.26,64.73
  Top 0.305: 88.26,64.73 88.89,65.37 88.89,65.88 JP15.9
N$178
  Top 0.254: 88.26,66 U$8.10
  Top 0.305: 88.26,66 88.89,66.64 88.89,68.92 89.66,69.69 JP15.10
N$179
  Top 0.305: U$8.11 85.85,67.02 85.08,67.78 85.08,73.5 88.89,77.3 92.07,77.3 93.34,76.03 93.34,74.13 92.07,72.86 JP15.11
N$180
  Top 0.305: U$8.12 87.32,73.19 89.53,75.4 JP15.12
N$181
  Top 0.305: U$8.24 79.04,49.67 76.83,47.46 JP16.1
N$182
  Top 0.305: U$8.23 80.77,55.59 81.27,55.08 81.27,49.37 77.46,45.55 74.29,45.55 73.02,46.82 73.02,48.73 74.29,50 JP16.2
N$183
  Top 0.254: U$8.22 78.1,56.6
  Top 0.305: 78.1,56.6 77.46,55.97 77.46,53.94 76.7,53.17 JP16.3
N$184
  Top 0.254: U$8.21 78.1,57.87
  Top 0.305: 78.1,57.87 77.46,57.24 77.46,56.73 76.45,55.71 JP16.4
N$185
  Top 0.305: U$8.20 77.97,59.4 76.19,57.62 JP16.5
N$186
  Top 0.305: U$8.19 77.34,60.67 76.83,60.16 JP16.6
N$187
  Top 0.305: U$8.18 77.59,61.94 76.83,62.7 JP16.7
N$188
  Top 0.305: U$8.17 78.23,63.21 76.19,65.24 JP16.8
N$189
  Top 0.254: U$8.16 78.1,64.73
  Top 0.305: 78.1,64.73 77.46,65.37 77.46,65.88 JP16.9
N$190
  Top 0.254: U$8.15 78.1,66
  Top 0.305: 78.1,66 77.46,66.64 77.46,68.92 76.7,69.69 JP16.10
N$191
  Top 0.305: U$8.14 80.51,67.02 81.27,67.78 81.27,73.5 77.46,77.3 74.29,77.3 73.02,76.03 73.02,74.13 74.29,72.86
  Top 0.406: 74.29,72.86 JP16.11
N$192
  Top 0.305: U$8.13 79.04,73.19 76.83,75.4 JP16.12
(copper drawn outside any net)
  shapes: Top circle x8

## Text on the board
_tNames: JP2 | U$1 | JP1